# Altium PCB PCB1.PcbDoc
Units mm, origin at the board's own origin, x right, y up, seen from the top; angles counter-clockwise.
Board outline 34 x 28.5 mm, 2 copper layers (Top Layer, Bottom Layer); 14 components, 11 nets, 35 pads, 16 vias.
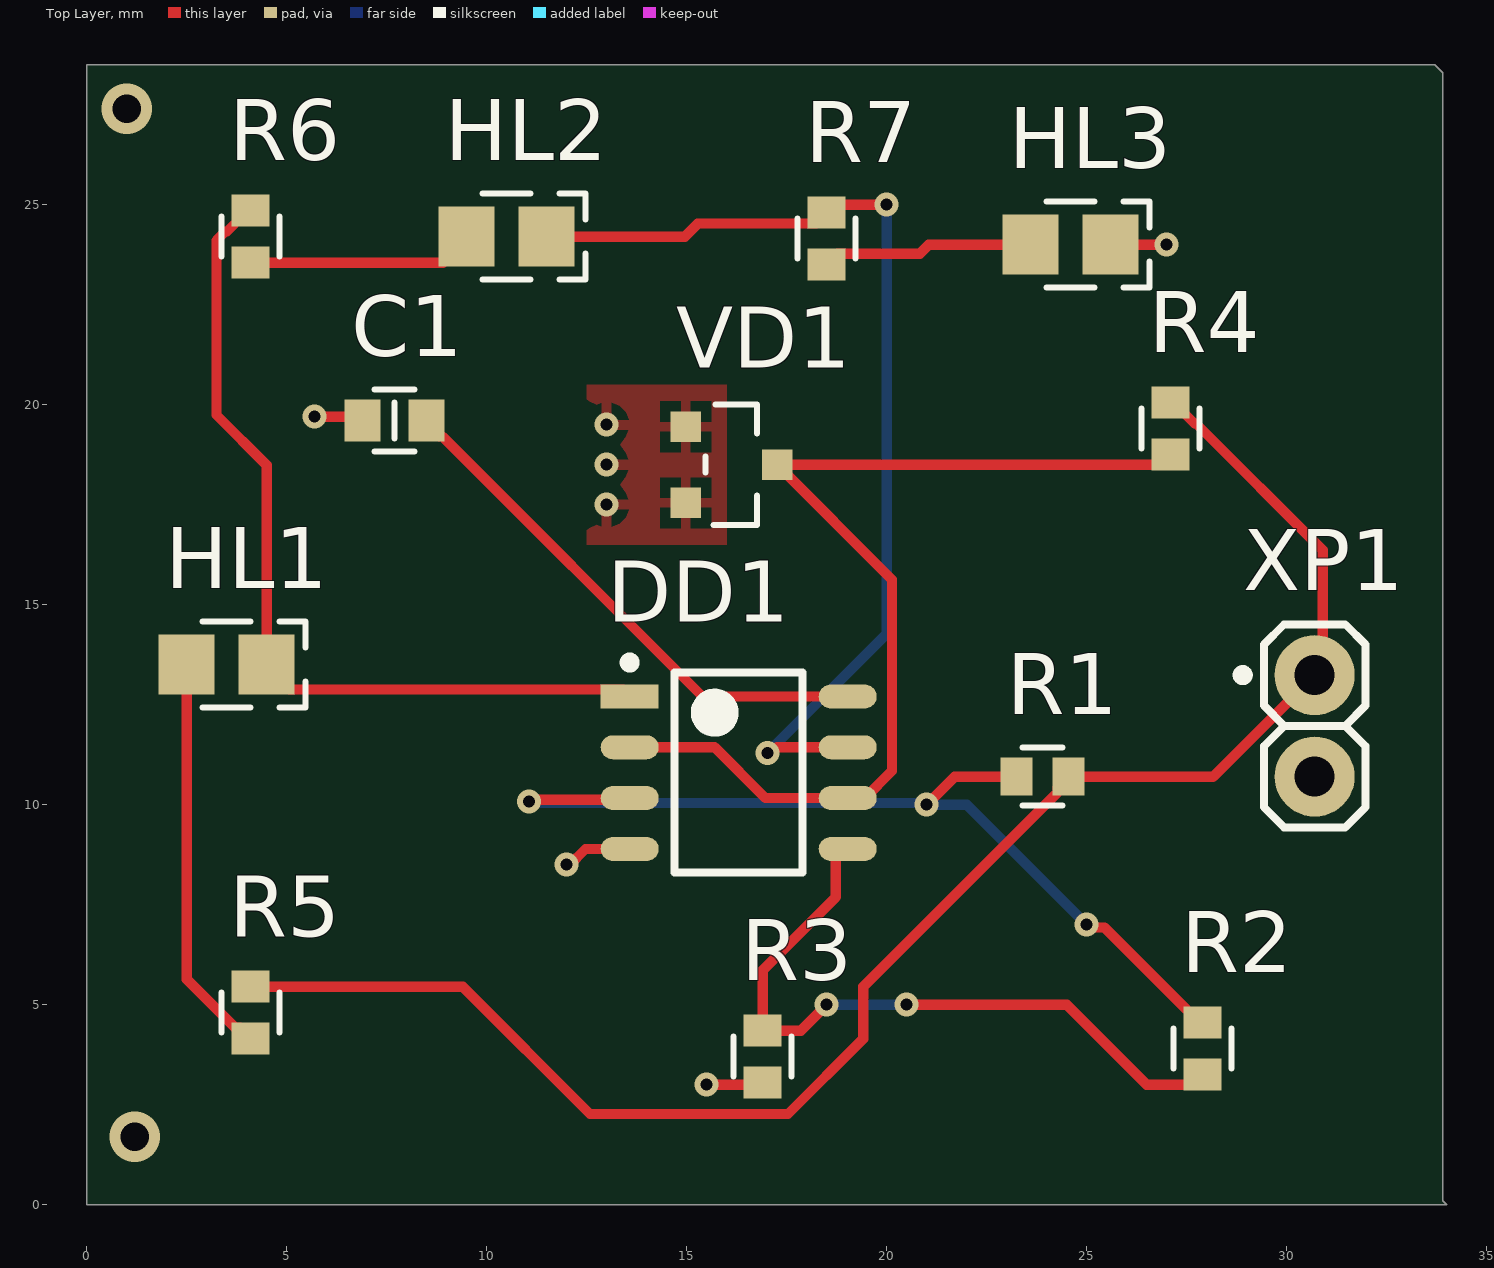
[diagram p0: Top Layer view]
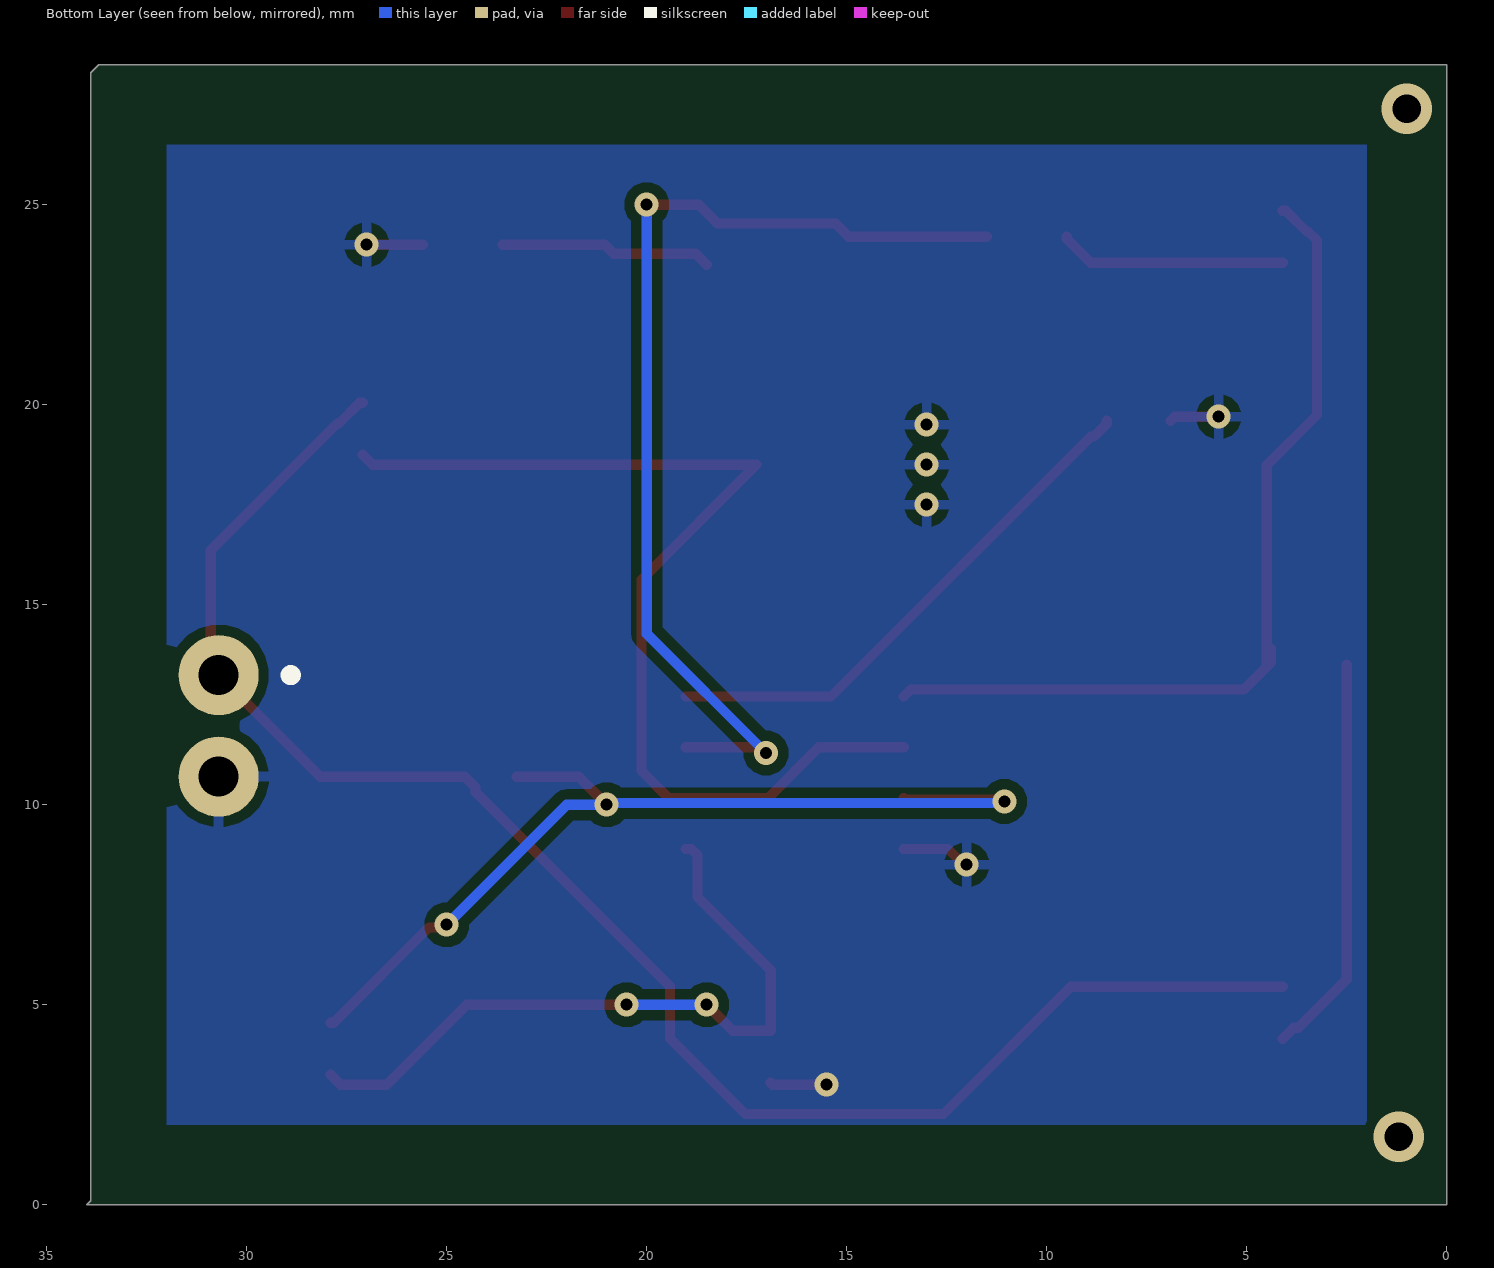
[diagram p1: Bottom Layer view, seen from below]

## Layer stack, top to bottom
Top Solder: solder mask 0.0102, Solder Resist, Dk 3.5
Top Layer: signal copper 0.0356
Dielectric 1: dielectric 0.32, FR-4, Dk 4.8
Bottom Layer: signal copper 0.0356
Bottom Solder: solder mask 0.0102, Solder Resist, Dk 3.5

## Board outline
0,0 0,28.5 33.7,28.5 33.9,28.3 33.9,0.1 34,0

## Design rules (kind name [scope] priority, off if disabled: settings)
Clearance [All] p1: gap=0.254 ignorepadtopadclearanceinfootprint=FALSE
PolygonConnect [All] p1: connectstyle=Relief reliefconductorwidth=0.254 reliefentries=4 polygonreliefangle="90 Angle" airgapwidth=0.254
RoutingVias [All] p1: holewidth=0.711 width=1.27 viastyle="Through Hole" minholewidth=0.711 minwidth=1.27 maxholewidth=0.711 maxwidth=1.27
SolderMaskExpansion [All] p1: expansion=0.102 istentingtop=FALSE
Width [All] p1: maxlimit=0.254 minlimit=0.254 preferedwidth=0.254
30 further rules are at their usual default settings.

## Components (designator, comment, footprint, x,y, rotation, side; value= is the part's Value field where it differs from the comment)
C1 "Capacitor" 0603C 7.7,19.6 r0 top value="0,1 мк"
DD1 "LM393" SOIC-8 16.3,10.8 r0 top
HL1 "LED" 0805D 3.5,13.5 r0 top
HL2 "LED" 0805D 10.5,24.2 r0 top
HL3 "LED" 0805D 24.6,24 r0 top
R1 "Resistor" 0603R 23.9,10.7 r0 top value=10
R2 "Resistor" 0603R 27.9,3.9 r90 top value=4,3
R3 "Resistor" 0603R 16.9,3.7 r90 top value="43 к"
R4 "Resistor" 0603R 27.1,19.4 r90 top value=4,3
R5 "Resistor" 0603R 4.1,4.8 r90 top value="10 к"
R6 "Resistor" 0603R 4.1,24.2 r90 top value="10 к"
R7 "Resistor" 0603R 18.5,24.15 r90 top value="10 к"
VD1 "BZX84-B11" SOT23-3 16.1,18.5 r0 top value="11 В"
XP1 "PLS-2" PLS2 30.7,13.24 r0 top

## Footprints (in the part's own frame and the unit in brackets; to place one, negate y for a bottom-side part, rotate by r counter-clockwise, add the part's x,y. Pads: shape width x height; smd on the part's side, far side on the other; paste and mask are expansions set on the pad)
0603C [mm] "Chip Resistor, 2-Leads, Body 1,40x0,80mm, IPC Medium Density"
  rect 0.9x1.05 smd: 1(-0.8,0) 2(0.8,0)
  silkscreen extent -0.5,-0.77 0.5,0.77, body extent -0.85,-0.45 0.85,0.45, height 0.9
0603R [mm] "Chip Resistor, 2-Leads, Body 1.60x0.85mm, IPC Medium Density"
  rect 0.8x0.95 smd: 1(-0.65,0) 2(0.65,0)
  silkscreen extent -0.5,-0.72 0.5,0.72, body extent -0.87,-0.47 0.88,0.48, height 0.9
0805D [mm]
  rect 1.4x1.5 smd: 1(-1,0) 2(1,0)
  silkscreen extent -0.6,-1.07 1.97,1.07, body extent -1.07,-0.7 1.07,0.7, height 0.7
PLS2 [mm]
  round 2 hole 1: 1(0,0) 2(0,-2.54)
  silkscreen extent -1.92,-3.81 1.27,1.27, body extent -1.27,-3.81 1.27,1.27, height 8.44
SOIC-8 [mm] "for operational amplifier"
  rect 1.45x0.6 smd: 1(-2.725,1.905)
  oval 1.45x0.6 smd: 2(-2.725,0.635) 3(-2.725,-0.635) 4(-2.725,-1.905) 5(2.725,-1.905) 6(2.725,-0.635) 7(2.725,0.635) 8(2.725,1.905)
  silkscreen extent -2.85,-2.5 1.6,2.88, body extent -3,-2.5 3,2.5, height 1.75
SOT23-3 [mil]
  rect 30x30 smd: 1(-44.29,37.4) 2(-44.29,-37.6) 3(45.71,-0.1)
  silkscreen extent -25,-59 26,59, body extent -48,-60 50,59, height 41

## Part data
C1: library part Capacitor_0,1u_10_50V_X7R_0603C, "Конденсатор 0603C ёмкостью 0,1 мк 10%, 50 В, X7R", Capacity (nF)=100, Dielectric=X7R, Tolerance=10%, Voltage (V)=50, Library Path2=Schematic\Capacitor.SchLib, Part Number=Capacitor_0,1u_10_50V_X7R_0603C
DD1: "Двойной маломощный компаратор напряжения", Package="SOIC-8 Texas Instruments", Check_prices=https://www.snapeda.com/parts/LM393D/Texas+Instruments/view-part/?ref=eda, MF="Texas Instruments", MP=LM393D, Part Number=LM393, SnapEDA_Link=https://www.snapeda.com/parts/LM393D/Texas+Instruments/view-part/?ref=snap
HL1: "Светодиод", Color=Красный, Part Number=LED
HL2: "Светодиод", Color=Желтый, Part Number=LED
HL3: "Светодиод", Color=Зеленый, Part Number=LED
R1: library part Resistor_10_1_0603, "Резистор номиналом 10 Ом 1%", Tolerance=1%, Part Number=Resistor_10_1_0603
R2 R4: library part Resistor_4.3_1_0603, "Резистор номиналом 4,3 Ом 1%", Tolerance=1%, Part Number=Resistor_4.3_1_0603
R3: library part Resistor_43k_1_0603, "Резистор номиналом 43 кОм 1%", Tolerance=1%, Part Number=Resistor_43k_1_0603
R5 R6 R7: library part Resistor_10k_1_0603, "Резистор номиналом 10 кОм 1%", Tolerance=1%, Part Number=Resistor_10k_1_0603
VD1: "Стабилитрон на 11 В, рассеиваемая мощность 0.25 Вт", Current nominal (mA)=5, Power (W)=0.25, Voltage nominal (V)=11, Accuracy=0,02, Part Number=BZX84-B11
XP1: "Гребенка 2 пина", Part Number=PLS-2, System=Connector, Общий=Общий

## Via types
v1: diameter 0.6, hole 0.3, Top Layer to Bottom Layer, 14 vias
v2: diameter 1.27, hole 0.711, Top Layer to Bottom Layer, 2 vias

## Nets (pads, with @x,y where several pads share a name; then routed paths per layer and width w, separated by ;. In a path a pad name is that pad's centre, name@x,y a point inside that pad or via, vN(x,y) a via of type N, cw(c..) or ccw(c..) an arc to the next point about the centre after c; other vN are vias at no path point)
GND: C1.1 DD1.4 HL3.2 R3.1 VD1.1 VD1.2 XP1.2 | length 5.8
  Top Layer w0.254: v1(5.7,19.7) 6.8,19.7 C1.1 ; v1(12,8.5) 12.074,8.5 12.469,8.895 DD1.4 ; v1(15.5,3) 16.85,3 R3.1 ; HL3.2 v1(27,24)
  other v1: 13,17.5 13,18.5 13,19.5
NetC1_2: C1.2 DD1.8 | length 13.4
  Top Layer w0.254: C1.2 8.5,19.525 8.823,19.202 8.898,19.202 15.395,12.705 DD1.8
NetDD1_1: DD1.1 HL1.2 R6.2 | length 22.6
  Top Layer w0.254: R6.2 4.025,24.85 3.506,24.331 3.467,24.331 3.244,24.108 3.244,19.743 4.5,18.487 HL1.2 4.5,13.8 4.4,13.9 4.4,13.55 5.073,12.877 13.403,12.877 DD1.1
NetDD1_2: DD1.2 DD1.6 R4.1 VD1.3 | length 26.1
  Top Layer w0.254: DD1.2 15.698,11.435 16.968,10.165 DD1.6 19.45,10.165 20.131,10.846 20.131,15.628 VD1.3 26.848,18.498 R4.1
NetDD1_3: DD1.3 R1.1 R2.2 | length 24.2
  Top Layer w0.254: v1(11.058,10.082) 11.1,10.123 13.533,10.123 DD1.3 ; v1(21,10) 21.7,10.7 R1.1 ; v1(25,7) 25.066,6.934 25.441,6.934 27.825,4.55 R2.2
  Bottom Layer w0.254: v1(11.058,10.082) 11.099,10.041 20.959,10.041 v1(21,10) 22,10 v1(25,7)
NetDD1_5: DD1.5 R2.1 R3.2 | length 17.7
  Top Layer w0.254: v1(18.5,5) 17.85,4.35 R3.2 16.9,5.862 18.727,7.689 18.727,8.735 18.887,8.895 DD1.5 ; v1(20.5,5) 24.5,5 26.5,3 27.65,3 R2.1
  Bottom Layer w0.254: v1(18.5,5) v1(20.5,5)
NetDD1_7: DD1.7 HL2.2 R7.2 | length 25.8
  Top Layer w0.254: HL2.2 14.949,24.2 15.276,24.527 18.227,24.527 R7.2 18.7,25 v1(20,25) ; v1(17.017,11.292) 17.11,11.292 17.253,11.435 DD1.7
  Bottom Layer w0.254: v1(17.017,11.292) 20,14.276 v1(20,25)
NetHL1_1: HL1.1 R5.1 | length 10.1
  Top Layer w0.254: HL1.1 2.5,5.636 3.713,4.423 3.827,4.423 R5.1
NetHL2_1: HL2.1 R6.1 | length 5.7
  Top Layer w0.254: R6.1 8.9,23.55 9.5,24.15 HL2.1
NetHL3_1: HL3.1 R7.1 | length 5.3
  Top Layer w0.254: R7.1 18.773,23.773 20.824,23.773 21.051,24 HL3.1
NetR1_2: R1.2 R4.2 R5.2 XP1.1 | length 41.8
  Top Layer w0.254: R5.2 9.4,5.45 12.581,2.269 17.533,2.269 19.414,4.15 19.414,5.45 24.277,10.313 24.277,10.427 R1.2 28.16,10.7 30.9,13.44 30.9,16.364 27.733,19.531 27.694,19.531 27.175,20.05 R4.2
copper on no net:
  other v2: 1.2,1.7 1,27.4

## Polygon pours and split planes (outlines as drawn)
GND on Top Layer "GND_L01_P001" (solid, pour order 1): 12.5,20.5 12.5,16.5 16,16.5 16,20.5 13,20.5
GND on Bottom Layer "GND_L02_P000" (solid, pour order 0): 2,26.5 32,26.5 32,2 2,2

## Silkscreen, mask and mechanical layers (free items; w line width, h text height)
Mechanical 1:
  lines w0.254: 0,0 0,5.2 0,28.5 33.7,28.5 33.9,28.3 33.9,0.1 34,0 0,0